# Altium PCB 电源板双层.PcbDoc
Units mm, origin at the board's own origin, x right, y up, seen from the top; angles counter-clockwise.
Board outline 30 x 17.5 mm, 2 copper layers (Top Layer, Bottom Layer); 26 components, 9 nets, 72 pads, 69 vias.
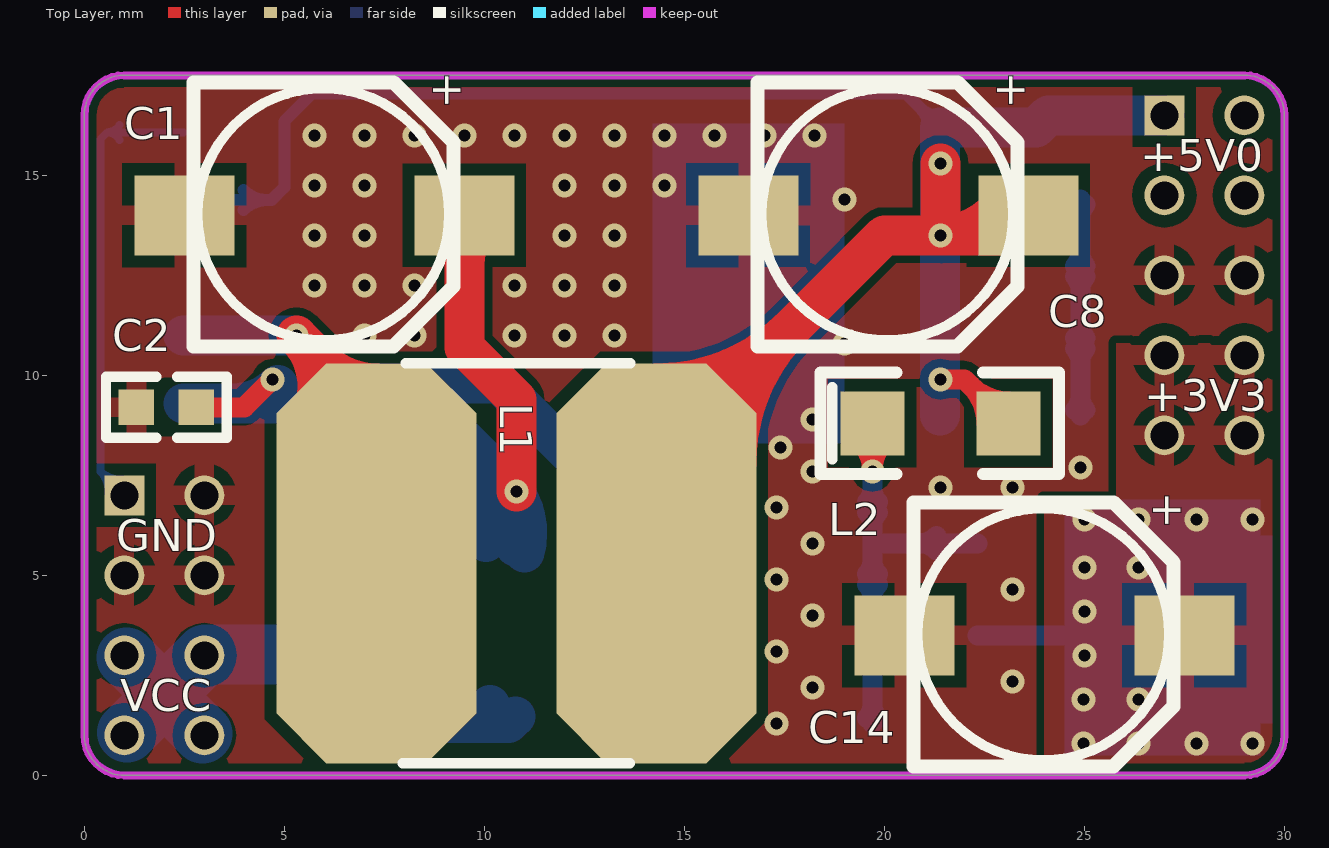
[diagram p0: Top Layer view]
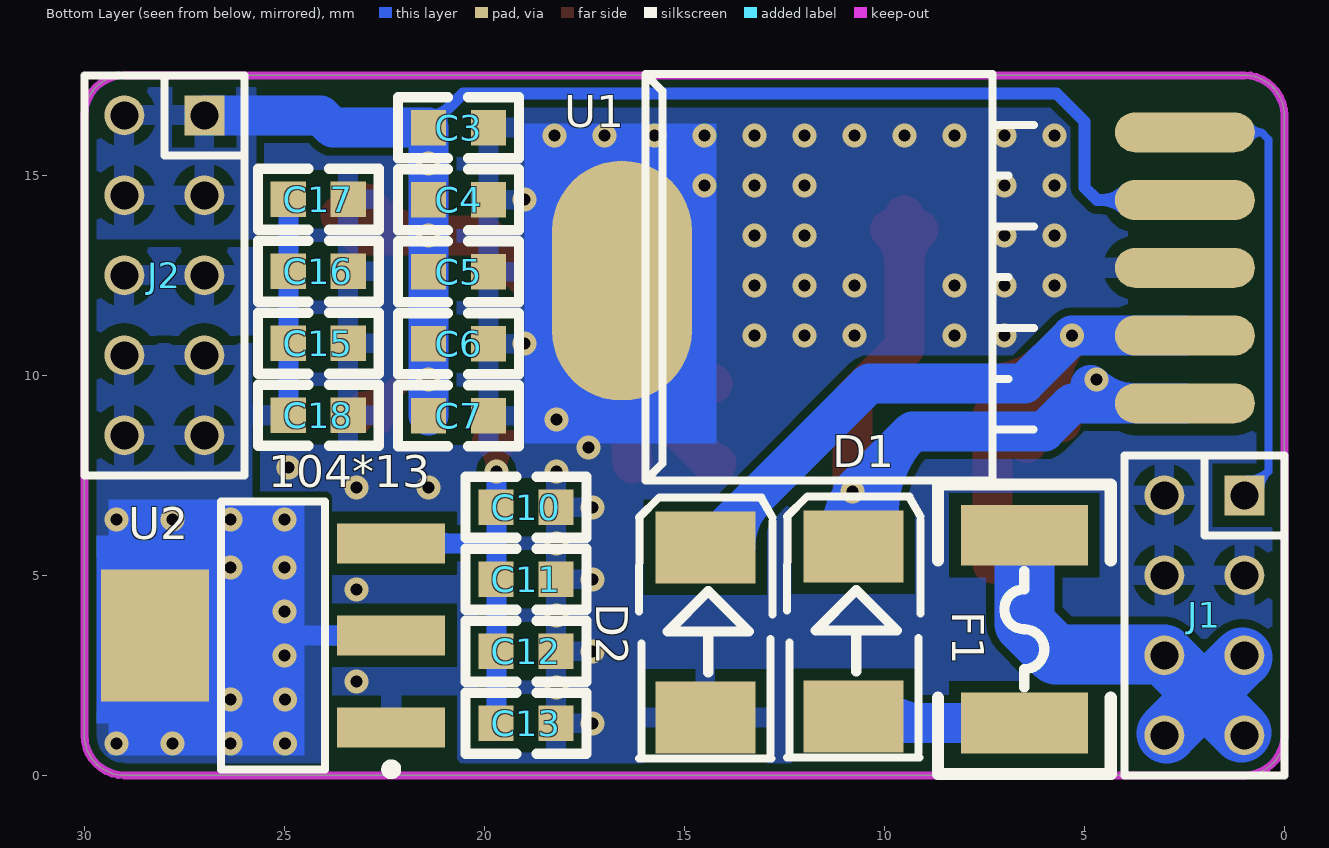
[diagram p1: Bottom Layer view, seen from below]

## Layer stack, top to bottom
Top Layer: signal copper 0.0356
Dielectric: core 0.32, FR-4, Dk 4.8
Bottom Layer: signal copper 0.0356

## Board outline
0,1 ccw(c1,1) 1,0 29,0 ccw(c29,1) 30,1 30,16.5 ccw(c29,16.5) 29,17.5 1,17.5 ccw(c1,16.5) 0,16.5

## Design rules (kind name [scope] priority, off if disabled: settings)
Clearance 敷铜与焊盘的间距 [(InPadClass('All Pads')) vs InPolygon] p1: gap=0.3 // 敷铜与焊盘的间距应不小于0.254mm，这里默认为0.3mm。
Clearance 整体布线间距 [All] p2: gap=0.2 // 这个针对整体布线间距用，默认为0.2MM
ComponentClearance 器件间距 [All] p1 off: gap=0.254 collisioncheckmode=3 verticalgap=0.254 showdistances=FALSE
Height [All] p1 off: minheight=0 maxheight=25.4 prefheight=12.7
PlaneClearance [All] p1: clearance=0.5
PlaneConnect 过孔直连 [IsVia] p1: planeconnectstyle=Direct reliefexpansion=0.508 reliefentries=4 reliefconductorwidth=0.254 reliefairgap=0.254
PlaneConnect [All] p2: planeconnectstyle=Relief reliefexpansion=0.15 reliefentries=4 reliefconductorwidth=0.2 reliefairgap=0.3
PolygonConnect 过孔敷铜连接 [All vs IsVia] p1: connectstyle=Direct reliefconductorwidth=0.254 reliefentries=4 polygonreliefangle="90 Angle" airgapwidth=0.254 // 过孔敷铜连接为直连型
PolygonConnect 整版敷铜连接 [All] p2: connectstyle=Relief reliefconductorwidth=0.5 reliefentries=4 polygonreliefangle="90 Angle" airgapwidth=0.3 // 整版敷铜连接为散热型。导线宽度0.2mm；间距：0.3mm。
RoomDefinition 电源板 [InComponentClass('电源板')] p1: confinementstyle=ConfineIn formatcopy=TRUE lockcomponents=FALSE outline 30.5,-0.5 30.5,18.034 -0.5,18.034 -0.5,-0.5
RoutingVias 过孔尺寸 [All] p1: holewidth=0.3 width=0.6 viastyle="Through Hole" minholewidth=0.3 minwidth=0.6 maxholewidth=0.3 maxwidth=0.6
ShortCircuit 短路允许 [All] p1: allowed=FALSE // 默认为不允许短路。
SolderMaskExpansion [All] p1: expansion=0.102
UnRoutedNet 开路约束 [All] p1:
Width 整体线宽 [All] p1: maxlimit=2 minlimit=0.2 preferedwidth=0.2 minimp=50.000000 maximp=50.000000 favimp=50.000000 // 整体线宽默认为：最小：0.2mm；最大：2mm；默认：0.2mm。
22 further rules are at their usual default settings.

## Components (designator, comment, footprint, x,y, rotation, side; value= is the part's Value field where it differs from the comment)
C1 "680UF/50V" 固态电容 6,14 r0 top
C2 "104" 0603A 1.3,9.2 r0 top
C3 "104" 0603A 19.892,16.188 r0 bottom
C4 "104" 0603A 19.892,14.388 r0 bottom
C5 "104" 0603A 19.892,12.588 r0 bottom
C6 "104" 0603A 19.892,10.788 r0 bottom
C7 "104" 0603A 19.892,8.988 r0 bottom
C8 "220UF/25V" 固态电容 20.1,14 r0 top
C10 "104" 0603A 19.705,6.7 r180 bottom
C11 "104" 0603A 19.705,4.9 r180 bottom
C12 "104" 0603A 19.705,3.1 r180 bottom
C13 "104" 0603A 19.705,1.3 r180 bottom
C14 "470UF" 固态电容 24,3.5 r0 top
C15 "104" 0603A 24.9,10.8 r180 bottom
C16 "104" 0603A 24.9,12.6 r180 bottom
C17 "104" 0603A 24.9,14.4 r180 bottom
C18 "104" 0603A 24.9,9 r180 bottom
D1 "5819" 贴片二极管 10.7,7.025 r90 bottom
D2 "IN5824" 贴片二极管 14.4,7 r90 bottom
F1 "2A" "自恢复保险丝 - duplicate" 6.5,6 r270 bottom
J1 "Header 8" 2.0排针2X4 1,7 r270 bottom
J2 "Header 10" 2.0排针2X10 27,16.5 r270 bottom
L1 "33UH" SMD-100 10.8,5.3 r180 top (schematic designator L2)
L2 "100UH" 1206C 23.1,8.8 r180 top
U1 "LM2596" TO-263-5 3.176,9.3 r90 bottom (schematic designator U97)
U2 "SP1117" SOT223 25.278,3.5 r0 bottom

## Footprints (in the part's own frame and the unit in brackets; to place one, negate y for a bottom-side part, rotate by r counter-clockwise, add the part's x,y. Pads: shape width x height; smd on the part's side, far side on the other; paste and mask are expansions set on the pad)
2.0排针2X4 [mm]
  rect 1x1 hole 0.7: 1(0,0)
  round 1 hole 0.7: 2(0,-2) 3(2,0) 4(2,-2) 5(4,0) 6(4,-2) 7(6,0) 8(6,-2)
  silkscreen extent -1,-3 7,1
2.0排针2X10 [mm]
  rect 1x1 hole 0.7: 1(0,0)
  round 1 hole 0.7: 2(0,-2) 3(2,0) 4(2,-2) 5(4,0) 6(4,-2) 7(6,0) 8(6,-2) 9(8,0) 10(8,-2)
  silkscreen extent -1,-3 9,1
0603A [mm]
  rect 0.88x0.88 smd: 1(0,0) 2(1.5,0)
  silkscreen extent -0.76,-0.76 2.26,0.76, body extent 0,-0.54 1.5,0.54, height 1.45
1206C [mm]
  rect 1.6x1.6 smd: 1(0,0) 2(3.4,0)
  silkscreen extent -1.27,-1.27 4.7,1.27, body extent 0,-1.42 3.4,1.42, height 2
SMD-100 [mm]
  oct 5x10 smd: 1(-3.5,0) 2(3.5,0)
  silkscreen extent -2.85,-5 2.84,5
SOT223 [mm] "SOT223, 4-Leads, Body 6.5x3.5mm, Pitch 2.3mm, Lead Span 7mm, IPC Low Density"
  rect 2.7x1 smd: 1(-2.95,2.3) 2(-2.95,0) 3(-2.95,-2.3)
  rect 2.7x3.3 smd: 4(2.95,0)
  silkscreen extent -3.07,-3.35 1.3,3.47, body extent -1.85,-3.35 1.85,3.35, height 1.7
TO-263-5 [mm]
  oval 1x3.5 smd: 1(0,-0.691) 2(1.693,-0.691) 3(3.387,-0.691) 4(5.08,-0.691) 5(6.773,-0.691)
  oval 6x3.5 smd: 3(3.064,13.384)
  silkscreen extent -1.93,3.08 8.23,12.8
固态电容 [mm]
  rect 2.5x2 smd: 1(3.5,0) 2(-3.5,0)
  silkscreen extent -3.27,-3.27 3.22,3.33
"自恢复保险丝 - duplicate" [mil]
  rect 60x125 smd: 1(0,0) 2(185,0)
  silkscreen extent -50,-85 235,85
贴片二极管 [mm]
  rect 1.8x2.5 smd: A(-5.55,0.075) K(-1.3,0.075)
  silkscreen extent -6.58,-1.61 -0.05,1.73

## Part data
C1 C8 C14: library part "CAPACITOR POL", "Capacitor"
C2 C3 C4 C5 C6 C7 C10 C11 C12 C13 C15 C16 C17 C18: library part CAP, "Capacitor"
D1: library part 二极管
D2: library part 肖特基二极管
F1: library part "Fuse 1", "Fuse"
J1: "Header, 8-Pin"
J2: "Header, 10-Pin"
L1 L2: library part L1

## Via types
v1: diameter 0.6, hole 0.3, Top Layer to Bottom Layer, tented both sides, 69 vias

## Nets (pads, with @x,y where several pads share a name; then routed paths per layer and width w, separated by ;. In a path a pad name is that pad's centre, name@x,y a point inside that pad or via, vN(x,y) a via of type N, cw(c..) or ccw(c..) an arc to the next point about the centre after c; other vN are vias at no path point)
+3.3V: C14.1 C15.1 C16.1 C17.1 C18.1 J2.7 J2.8 J2.9 J2.10 U2.2 U2.4 | length 13.4
  Bottom Layer w0.5: U2.2 26,3.5 ; C18.1@24.766,9.134 ccw(c24.441,9.459) 24.9,9.459 ccw(c25.359,9.459) C18.1@25.034,9.134 ; C15.1@24.766,10.666 cw(c24.441,10.341) 24.9,10.341 cw(c25.359,10.341) C15.1@25.034,10.666 ; C15.1@24.766,10.934 ccw(c24.441,11.259) 24.9,11.259 ccw(c25.359,11.259) C15.1@25.034,10.934 ; C16.1@24.766,12.466 cw(c24.441,12.141) 24.9,12.141 cw(c25.359,12.141) C16.1@25.034,12.466 ; C16.1@24.766,12.734 ccw(c24.441,13.059) 24.9,13.059 ccw(c25.359,13.059) C16.1@25.034,12.734 ; C17.1@24.766,14.266 cw(c24.441,13.941) 24.9,13.941 cw(c25.359,13.941) C17.1@25.034,14.266 ; C18.1 C15.1 C17.1
  other v1: 24.978,0.8 26.351,0.8 27.8,0.8 29.2,0.8 24.978,1.9 26.351,1.9 25,3 25,4.1 25,5.2 26.351,5.2 25,6.4 26.351,6.4 27.8,6.4 29.2,6.4
+5V: C10.1 C11.1 C12.1 C13.1 L2.2 U2.3 | length 17.9
  Top Layer w0.5: L2.2@19.341,8.383 cw(c18.666,7.6) v1(19.7,7.6) ; L2.2 v1(19.7,7.6) ; L2.2@20.059,8.383 ccw(c20.734,7.6) v1(19.7,7.6)
  Bottom Layer w0.5: C13.1@19.571,1.434 ccw(c19.258,1.747) 19.7,1.747 ; C12.1@19.571,2.966 cw(c19.258,2.653) 19.7,2.653 ; C12.1@19.571,3.234 ccw(c19.258,3.547) 19.7,3.547 ; C11.1@19.571,4.766 cw(c19.258,4.453) 19.7,4.453 ; C11.1@19.571,5.034 ccw(c19.258,5.347) 19.7,5.347 ; C10.1@19.571,6.566 cw(c19.258,6.253) 19.7,6.253 ; C10.1@19.571,6.834 ccw(c19.258,7.147) 19.7,7.147 ; 19.7,1.771 ccw(c20.176,1.771) C13.1@19.839,1.434 ; 19.7,2.629 cw(c20.176,2.629) C12.1@19.839,2.966 ; 19.7,3.571 ccw(c20.176,3.571) C12.1@19.839,3.234 ; 19.7,4.429 cw(c20.176,4.429) C11.1@19.839,4.766 ; 19.7,5.371 ccw(c20.176,5.371) C11.1@19.839,5.034 ; 19.7,6.229 cw(c20.176,6.229) C10.1@19.839,6.566 ; 19.7,7.171 ccw(c20.176,7.171) C10.1@19.839,6.834 ; v1(19.7,7.6) 19.7,5.8 ; C13.1 19.7,1.305 19.7,5.8 ; U2.3@21.301,5.623 ccw(c20.874,5.196) 20.874,5.8 ccw(c20.874,6.404) U2.3@21.301,5.977 ; U2.3 19.7,5.8
E+5V: C3.2 C4.2 C5.2 C6.2 C7.2 C8.1 J2.1 J2.2 J2.3 J2.4 L1.1 L2.1 U1.4 | length 64.1
  Top Layer w0.5: v1(21.4,9.9) 22,9.9 L2.1 ; L2.1@22.55,8.8 ccw(c21.222,8.8) 22.161,9.739 ccw(c23.1,10.678) L2.1@23.1,9.35
  Top Layer w1: L1.1@14.2,7.8 14.3,7.8 20,13.5 v1(21.4,13.5) ; L1.1@14.3,9.8 ccw(c14.3,14.628) 17.714,11.214 ccw(c21.128,7.8) L1.1@16.3,7.8 ; v1(21.4,15.3) v1(21.4,13.5) ; C8.1@22.944,14.292 cw(c21.4,15.401) v1(21.4,13.5) ; C8.1 23.1,13.5 v1(21.4,13.5)
  Bottom Layer w0.3: U1.4 4.68,14.38 5,14.7 5,16.35 5.7,17.05 20.53,17.05 C3.2 ; U1.4@3.983,14.132 cw(c4.58,13.535) 4.58,14.38 cw(c4.58,15.225) U1.4@3.983,14.627 ; C3.2@21.102,16.188 ccw(c20.402,16.188) 20.897,16.683 ccw(c21.392,17.178) C3.2@21.392,16.478
  Bottom Layer w1: C7.2 C6.2 C5.2 C4.2 C3.2 23.788,16.188 24.1,16.5 J2.1
GND: C1.2 C2.1 C3.1 C4.1 C5.1 C6.1 C7.1 C8.2 C10.2 C11.2 C12.2 C13.2 C14.2 C15.2 C16.2 C17.2 C18.2 D2.A J1.2 J1.3 J1.4 J2.5 J2.6 U1.3 U2.1
  other v1: 17.3,1.3 18.2,2.2 23.2,2.35 17.3,3.1 18.2,4 23.2,4.65 17.3,4.9 18.2,5.8 17.3,6.7 21.4,7.2 23.2,7.2 18.2,7.6 24.9,7.7 17.4,8.2 18.2,8.9 19,10.8 7,11 8.25,11 10.75,11 12,11 13.25,11 5.75,12.25 7,12.25 8.25,12.25 10.75,12.25 12,12.25 13.25,12.25 5.75,13.5 7,13.5 12,13.5 13.25,13.5 19,14.4 5.75,14.75 7,14.75 12,14.75 13.25,14.75 14.5,14.75 5.75,16 7,16 8.25,16 9.5,16 10.75,16 12,16 13.25,16 14.5,16 15.75,16 17,16 18.25,16
NetC1_1: C1.1 C2.2 D1.K U1.1 | length 31.2
  Top Layer w0.5: C2.2 4,9.2 v1(4.7,9.9) ; C2.2@2.934,9.066 cw(c3.259,8.741) 3.259,9.2 cw(c3.259,9.659) C2.2@2.934,9.334
  Top Layer w1: C1.1@9.146,13.646 cw(c8.293,12.793) 9.5,12.793 cw(c10.707,12.793) C1.1@9.854,13.646 ; C1.1 9.5,10.7 10.8,9.4 v1(10.8,7.1)
  Bottom Layer w0.5: 4.7,9.3 v1(4.7,9.9)
  Bottom Layer w1: U1.1 4.7,9.3 5.3,9.3 6,8.6 9.3,8.6 ; U1.1@3.734,9.3 ccw(c3.734,10.866) v1@4.841,9.759 ; D1.K@10.039,5.829 ccw(c7.277,6.577) 9.3,8.6 ; D1.K@10.492,6.008 ccw(c9.749,6.751) 10.8,6.751 ; 10.521,7.379 cw(c9.199,6.057) D1.K@11.004,5.568 ; D1.K 10.8,5.75 v1(10.8,7.1) 9.3,8.6 ; 10.8,6.63 ccw(c11.68,6.63) D1.K@11.058,6.008
NetD1_A: D1.A F1.2 | length 5.6
  Bottom Layer w1: F1.2 10.601,1.301 D1.A ; 9.039,1.301 ccw(c9.039,2.861) D1.A@10.142,1.758
NetD2_K: D2.K L1.2 U1.2 | length 27.9
  Top Layer w1: L1.2@5.579,8.818 ccw(c4.039,9.729) v1(5.304,10.993) 7.3,8.997 L1.2 ; 5.929,10.368 ccw(c7.3,11.738) L1.2@7.3,9.8 ; L1.2@6.215,10.082 cw(c5.185,9.051) L1.2@6.439,8.309
  Bottom Layer w1: U1.2 v1(5.304,10.993) 6.497,9.8 10.375,9.8 D2.K ; 13.195,6.98 cw(c11.914,5.7) D2.K@13.725,5.7
NetJ1_1: J1.1 U1.5 | length 13.3
  Bottom Layer w0.2: J1.1@0.602,7.038 ccw(c-0.095,7.105) 0.4,7.6 ; U1.5@0.881,15.887 ccw(c0.573,15.725) 0.573,16.073 ; U1.5@0.881,16.259 cw(c0.573,16.421) 0.573,16.073 ; J1.1@0.962,7.398 cw(c0.895,8.095) 0.4,7.6 ; J1.1 0.4,7.6 ; U1.5 0.573,16.073 ; 0.4,7.6 0.4,15.9 0.573,16.073
VCC: F1.1 J1.5 J1.6 J1.7 J1.8 | length 11.4
  Bottom Layer w1.5: J1.5@1.05,2.95 2,2 ; J1.7@1.071,1.071 2,2 ; J1.8@2.95,1.05 2,2 ; F1.1 6.5,3.8 5.713,3.013 3.013,3.013 J1.6 2,2

## Polygon pours and split planes (outlines as drawn)
+3.3V on Top Layer "Bottom Layer-No Net" (solid, pour order 19): 30.2,0 30.2,10.8 25.8,10.8 25.8,6.9 24,6.9 24,0
GND on Top Layer "Bottom Layer-No Net" (solid, remove dead copper, pour order 14): 0,17.8 0,-0.3 30.3,-0.3 30.3,17.8
E+5V on Bottom Layer "Bottom Layer-No Net" (solid, pour order 6): 25.7,17.7 25.7,13.4 30.2,13.4 30.2,17.7
+3.3V on Bottom Layer "Bottom Layer-No Net" (solid, pour order 17): 30,10.8 25.8,10.8 25.8,6.9 24,6.9 24,0 30,0
GND on Bottom Layer "Bottom Layer-No Net" (solid, remove dead copper, pour order 13): 0,17.8 0,-0.3 30.3,-0.3 30.3,17.8

## Keep-outs
Keep-Out Layer:
  the board outline again, w0.2

## Other copper
Bottom Layer:
  rectangle net +3.3V: 29.3,1.3 29.7,6
  rectangle net +3.3V: 24.5,0.5 29.4,6.9
  rectangle net GND: 14.2,8.3 19,16.3

## Silkscreen, mask and mechanical layers (free items; w line width, h text height)
Top Overlay:
  text "+5V0" at 26.4,15.1 h0.8
  text "+3V3" at 26.5,9.1 h0.8
  text "GND" at 0.8,5.6 h0.8
  text "VCC" at 0.9,1.6 h0.8
Bottom Overlay:
  text "104*13" at 25.4,7.2 h0.8
Top Solder:
  text "YWS" at 12.2,16.9 h3 r270

## Dimensions
0,16.5 to 30,16.5 on Top Overlay
1,0 to 1,17.5 on Top Overlay

## Text inside footprints (layer, text, board x,y; h text height)
C1: Top Overlay "+" at 9.41,16.66 h0.8 r90
C8: Top Overlay "+" at 23.51,16.66 h0.8 r90
C14: Top Overlay "+" at 27.41,6.16 h0.8 r90